# Altium PCB INTERPLACA BORRADOR.PcbDoc
Units mm, origin at the board's own origin, x right, y up, seen from the top; angles counter-clockwise.
Board outline 152.4 x 101.6 mm, 2 copper layers (Top Layer, Bottom Layer); 7 components, 13 nets, 37 pads, 12 vias.
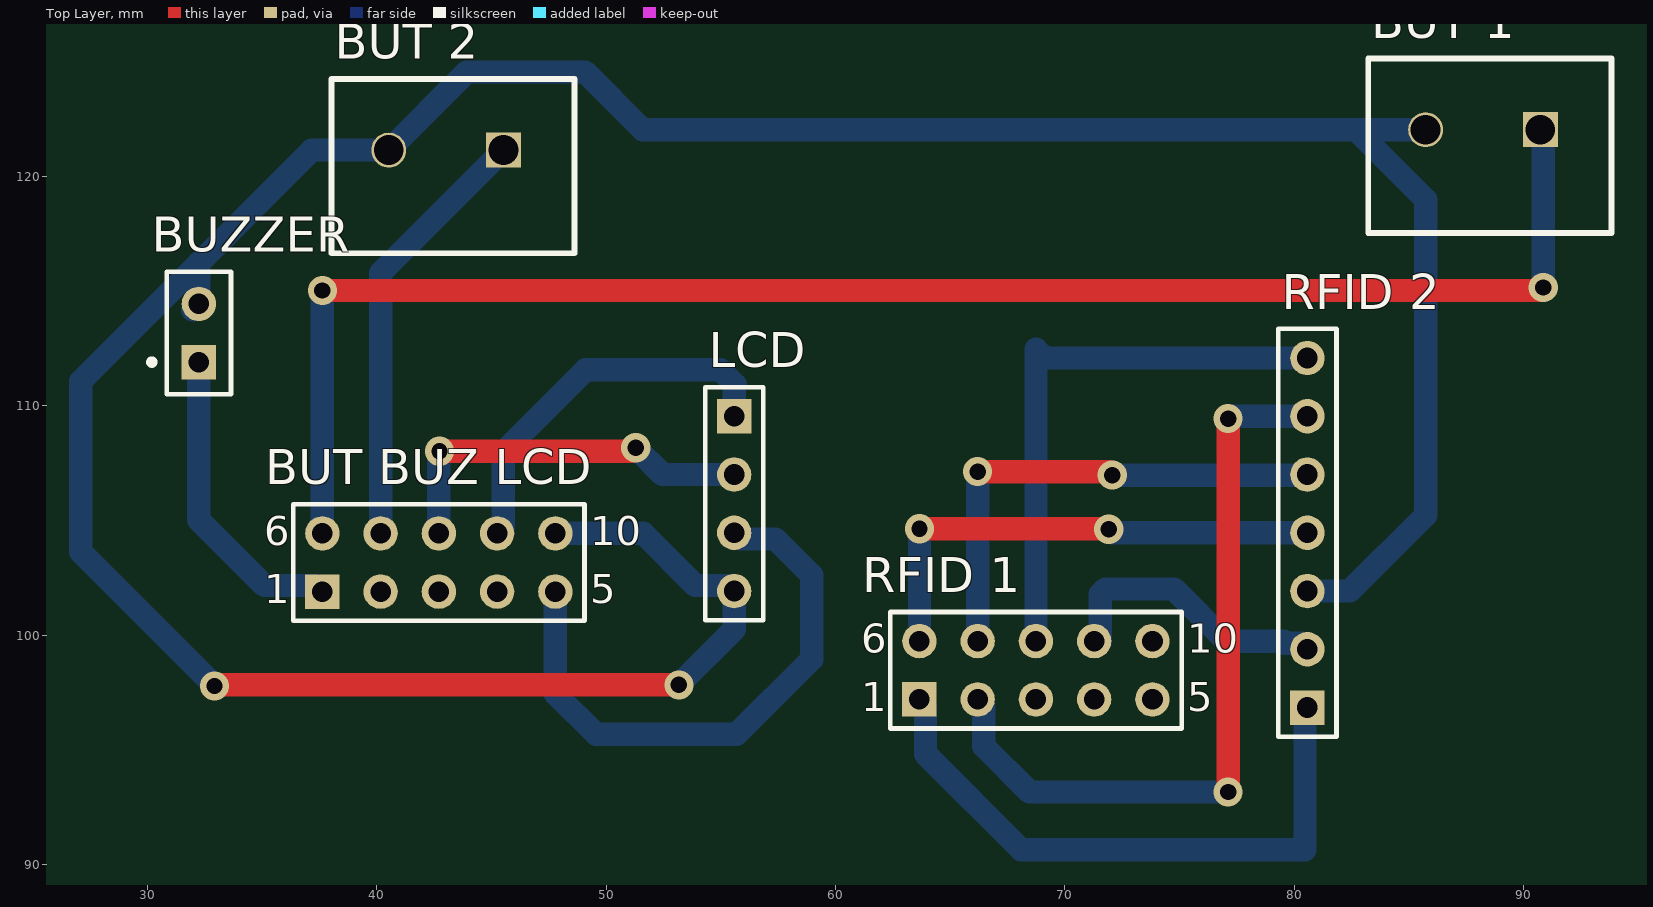
[diagram p0: Top Layer view]
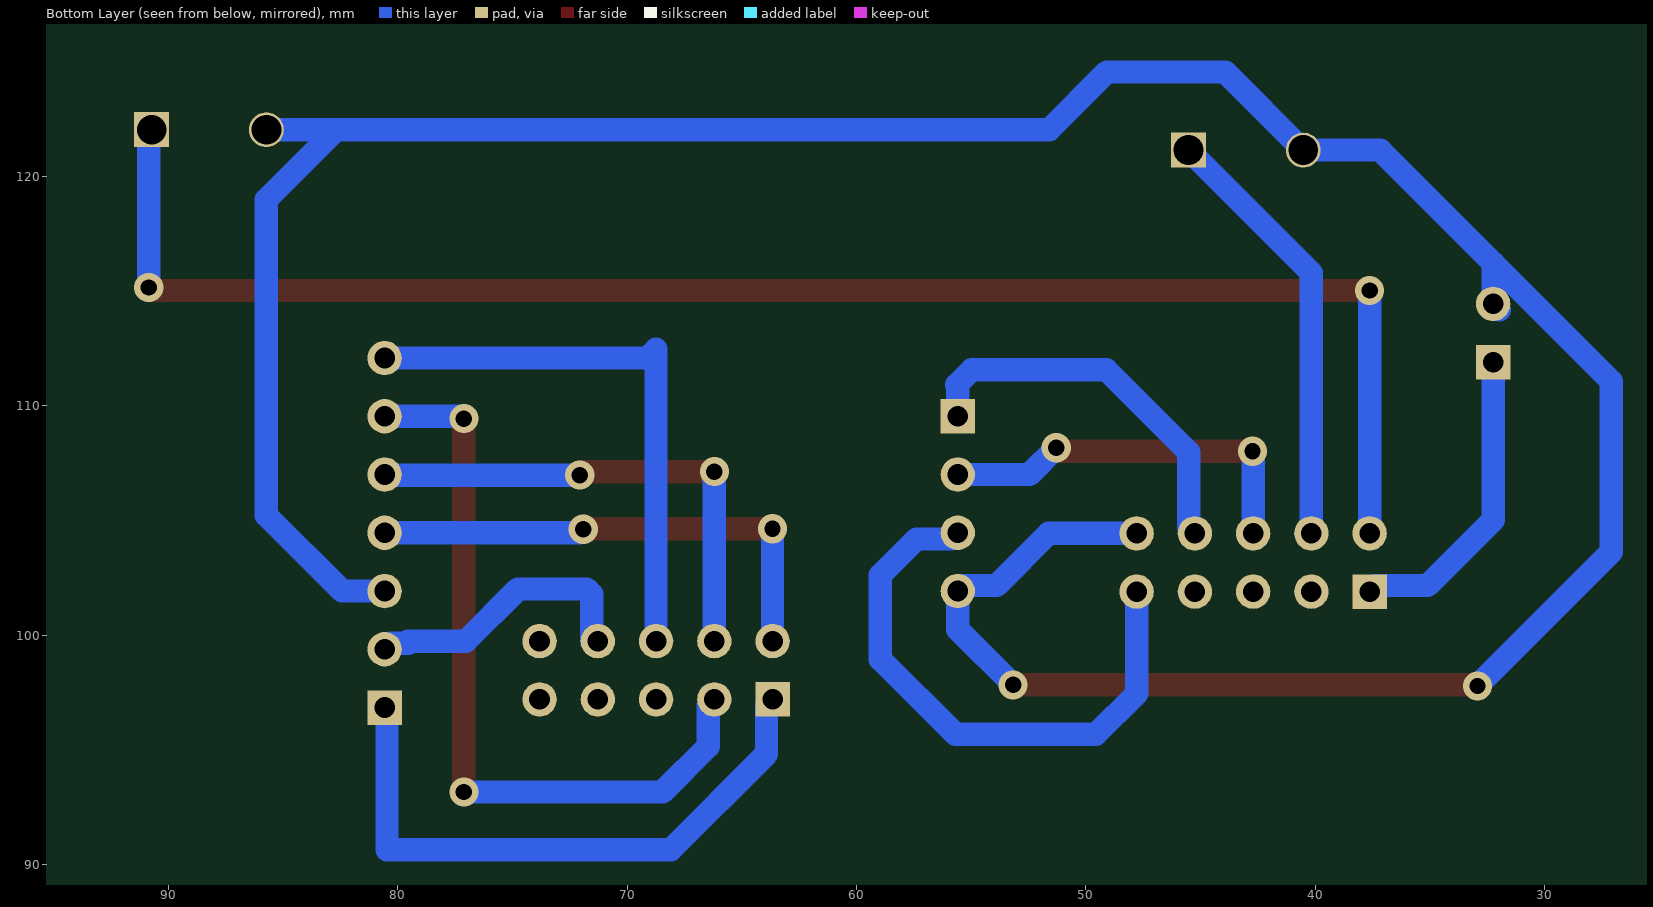
[diagram p1: Bottom Layer view, seen from below]

## Layer stack, top to bottom
Top Solder: solder mask 0.0102, Solder Resist, Dk 3.5
Top Layer: signal copper 0.0356
Dielectric 1: dielectric 0.32, FR-4, Dk 4.8
Bottom Layer: signal copper 0.0356
Bottom Solder: solder mask 0.0102, Solder Resist, Dk 3.5

## Board outline
25.4,25.4 177.8,25.4 177.8,127 25.4,127

## Design rules (kind name [scope] priority, off if disabled: settings)
Clearance [All] p1: gap=1.016 ignorepadtopadclearanceinfootprint=FALSE
PolygonConnect [All] p1: connectstyle=Relief reliefconductorwidth=0.254 reliefentries=4 polygonreliefangle="90 Angle" airgapwidth=0.254
RoomDefinition INTERPLACA [InComponentClass('INTERPLACA')] p1: confinementstyle=ConfineIn formatcopy=TRUE lockcomponents=FALSE outline 0,0 50.8,0 50.8,25.4 0,25.4
RoutingVias [All] p1: holewidth=0.711 width=1.27 viastyle="Through Hole" minholewidth=0.711 minwidth=1.27 maxholewidth=0.711 maxwidth=1.27
SolderMaskExpansion [All] p1: expansion=0.102
Width [All] p1: maxlimit=1.016 minlimit=1.016 preferedwidth=1.016
30 further rules are at their usual default settings.

## Components (designator, comment, footprint, x,y, rotation, side; value= is the part's Value field where it differs from the comment)
"BUT 1" "Header 2" "BORNERA 2 pin" 93.825,117.547 r180 top
"BUT 2" "Header 2" "BORNERA 2 pin" 48.613,116.658 r180 top
"BUT BUZ LCD" "Header 5X2A" HDR2X5_CEN 37.617,101.905 r0 top
BUZZER "Bell" PIN2 32.233,111.912 r90 top
LCD "Header 4" HDR1X4 55.575,109.55 r270 top
"RFID 1" "Header 5X2A" HDR2X5_CEN 63.652,97.206 r0 top
"RFID 2" "Header 7" HDR1X7 80.569,96.85 r90 top

## Footprints (in the part's own frame and the unit in brackets; to place one, negate y for a bottom-side part, rotate by r counter-clockwise, add the part's x,y. Pads: shape width x height; smd on the part's side, far side on the other; paste and mask are expansions set on the pad)
"BORNERA 2 pin" [mm]
  rect 1.524x1.524 hole 1.3: 1(3.1,-4.5)
  round 1.524 hole 1.3: 2(8.1,-4.5)
  silkscreen extent 0,-7.6 10.6,0
HDR1X4 [mm] "Connector; Header; 4 Position"
  rect 1.5x1.5 hole 0.9: 1(0,0)
  round 1.5 hole 0.9: 2(2.54,0) 3(5.08,0) 4(7.62,0)
  silkscreen extent -1.27,-1.27 8.89,1.27
HDR1X7 [mm] "Connector; Header; 7 Position"
  rect 1.5x1.5 hole 0.9: 1(0,0)
  round 1.5 hole 0.9: 2(2.54,0) 3(5.08,0) 4(7.62,0) 5(10.16,0) 6(12.7,0) 7(15.24,0)
  silkscreen extent -1.27,-1.27 16.51,1.27
HDR2X5_CEN [mm] "Connector; Header; 5x2 Position"
  rect 1.5x1.5 hole 0.9: 1(0,0)
  round 1.5 hole 0.9: 2(2.54,0) 3(5.08,0) 4(7.62,0) 5(10.16,0) 6(0,2.54) 7(2.54,2.54) 8(5.08,2.54) 9(7.62,2.54) 10(10.16,2.54)
  silkscreen extent -1.27,-1.27 11.43,3.81
PIN2 [mm] "Photosensitive Diode; 2 Leads"
  rect 1.5x1.5 hole 0.9: 1(0,0)
  round 1.5 hole 0.9: 2(2.54,0)
  silkscreen extent -1.4,-1.4 3.94,2.17

## Part data
"BUT 1" "BUT 2": "Header, 2-Pin", LatestRevisionDate=17-Jul-2002, LatestRevisionNote="Re-released for DXP Platform.", Publisher="Altium Limited"
"BUT BUZ LCD" "RFID 1": "Header, 5-Pin, Dual row", LatestRevisionDate=17-Jul-2002, LatestRevisionNote="Re-released for DXP Platform.", Publisher="Altium Limited"
BUZZER: "Electrical Bell", LatestRevisionDate=17-Jul-2002, LatestRevisionNote="Re-released for DXP Platform.", PackageReference=PIN2, Published=24-Mar-1999, Publisher="Altium Limited"
LCD: "Header, 4-Pin", LatestRevisionDate=17-Jul-2002, LatestRevisionNote="Re-released for DXP Platform.", Publisher="Altium Limited"
"RFID 2": "Header, 7-Pin", LatestRevisionDate=17-Jul-2002, LatestRevisionNote="Re-released for DXP Platform.", Publisher="Altium Limited"

## Via types
v1: diameter 1.27, hole 0.711, Top Layer to Bottom Layer, 12 vias

## Nets (pads, with @x,y where several pads share a name; then routed paths per layer and width w, separated by ;. In a path a pad name is that pad's centre, name@x,y a point inside that pad or via, vN(x,y) a via of type N, cw(c..) or ccw(c..) an arc to the next point about the centre after c; other vN are vias at no path point)
GND: "BUT 1.2" "BUT 2.2" "BUT BUZ LCD.10" "RFID 2.3" BUZZER.2 LCD.4 | length 141.9
  Top Layer w1.016: v1(32.918,97.79) 32.969,97.841 v1(53.162,97.841)
  Bottom Layer w1.016: BUZZER.2@31.967,114.186 BUZZER.2 32.233,116.231 ; v1(32.918,97.79) 27.076,103.632 27.076,111.075 32.233,116.231 ; 47.777,104.445 51.613,104.445 53.885,102.172 55.333,102.172 LCD.4 55.575,100.254 v1(53.162,97.841) ; 80.569,101.93 82.423,101.93 85.725,105.232 85.725,118.999 82.677,122.047 ; 85.725,122.047 82.677,122.047 ; 32.233,116.231 37.159,121.158 40.513,121.158 43.917,124.562 49.073,124.562 51.587,122.047 82.677,122.047
"Net BUT BUZ LCD_1": "BUT BUZ LCD.1" BUZZER.1 | length 13.6
  Bottom Layer w1.016: BUZZER.1 32.233,105.029 35.091,102.171 37.351,102.171 37.617,101.905
"Net BUT BUZ LCD_5": "BUT BUZ LCD.5" LCD.3 | length 25.5
  Bottom Layer w1.016: 47.777,101.905 47.777,97.46 49.555,95.682 55.677,95.682 58.953,98.958 58.953,102.616 57.365,104.204 55.841,104.204 LCD.3
"Net BUT BUZ LCD_8": "BUT BUZ LCD.8" LCD.2 | length 17
  Top Layer w1.016: v1(42.723,108.026) 51.13,108.026 v1(51.283,108.179)
  Bottom Layer w1.016: 42.697,104.445 42.697,108.001 v1(42.723,108.026) ; v1(51.283,108.179) 52.451,107.01 LCD.2
"Net BUT BUZ LCD_9": "BUT BUZ LCD.9" LCD.1 | length 16.9
  Bottom Layer w1.016: 45.237,104.445 45.503,104.711 45.503,107.987 49.098,111.582 54.966,111.582 55.626,110.922 55.575,110.871 LCD.1
"NetBUT 1_1": "BUT 1.1" "BUT BUZ LCD.6" | length 70.8
  Top Layer w1.016: v1(37.617,115.037) 90.729,115.037 v1(90.856,115.164)
  Bottom Layer w1.016: 37.617,104.445 v1(37.617,115.037) ; 90.725,122.047 90.856,121.916 v1(90.856,115.164)
"NetBUT 2_1": "BUT 2.1" "BUT BUZ LCD.7" | length 19
  Bottom Layer w1.016: 40.208,104.496 40.157,104.445 40.157,115.802 45.513,121.158
"NetRFID 1_1": "RFID 1.1" "RFID 2.1" | length 27
  Bottom Layer w1.016: 63.652,97.206 63.918,96.94 63.918,94.827 68.093,90.653 80.467,90.653 80.467,96.749 80.569,96.85
"NetRFID 1_2": "RFID 1.2" "RFID 2.6" | length 33.4
  Top Layer w1.016: v1(77.114,93.167) v1(77.114,109.449)
  Bottom Layer w1.016: 66.192,97.206 66.458,96.94 66.458,95.161 68.452,93.167 v1(77.114,93.167) ; v1(77.114,109.449) 77.216,109.55 80.569,109.55
"NetRFID 1_6": "RFID 1.6" "RFID 2.4" | length 21.9
  Top Layer w1.016: v1(63.652,104.648) 71.882,104.648 v1(71.907,104.623)
  Bottom Layer w1.016: 63.652,99.746 v1(63.652,104.648) ; v1(71.907,104.623) 72.06,104.47 80.569,104.47
"NetRFID 1_7": "RFID 1.7" "RFID 2.5" | length 21.8
  Top Layer w1.016: v1(66.192,107.137) 71.907,107.137 v1(72.06,106.985)
  Bottom Layer w1.016: 66.192,99.746 v1(66.192,107.137) ; v1(72.06,106.985) 80.543,106.985 80.569,107.01
"NetRFID 1_8": "RFID 1.8" "RFID 2.7" | length 24.7
  Bottom Layer w1.016: 68.732,99.746 68.732,112.471 69.113,112.09 80.569,112.09
"NetRFID 1_9": "RFID 1.9" "RFID 2.2" | length 12.6
  Bottom Layer w1.016: 71.272,99.746 71.538,99.746 71.538,101.791 71.767,102.02 74.754,102.02 77.028,99.746 79.537,99.746 79.537,99.656 80.303,99.656 80.569,99.39
pads on no net: "BUT BUZ LCD.2" "BUT BUZ LCD.3" "BUT BUZ LCD.4" "RFID 1.3" "RFID 1.4" "RFID 1.5" "RFID 1.10"

## Text inside footprints (layer, text, board x,y; h text height)
"BUT BUZ LCD": Top Overlay "6" at 35.077,103.937 h1.27; Top Overlay "10" at 49.301,103.937 h1.27; Top Overlay "5" at 49.301,101.397 h1.27; Top Overlay "1" at 35.077,101.397 h1.27
"RFID 1": Top Overlay "6" at 61.112,99.238 h1.27; Top Overlay "10" at 75.336,99.238 h1.27; Top Overlay "5" at 75.336,96.698 h1.27; Top Overlay "1" at 61.112,96.698 h1.27